# Altium PCB backplane.PCBDOC (part 2 of 4)
Units mil, origin at the board's own origin, x right, y up, seen from the top; angles counter-clockwise.
Board outline 14000 x 4750 mil, 6 copper layers (Top Layer, Internal Plane 1, Mid-Layer 1, Mid-Layer 2, Internal Plane 2, Bottom Layer), stack 54.4 mil thick; 197 components, 240 nets, 1698 pads, 1024 vias.
Unrouted connection lines stored in the file: 2.
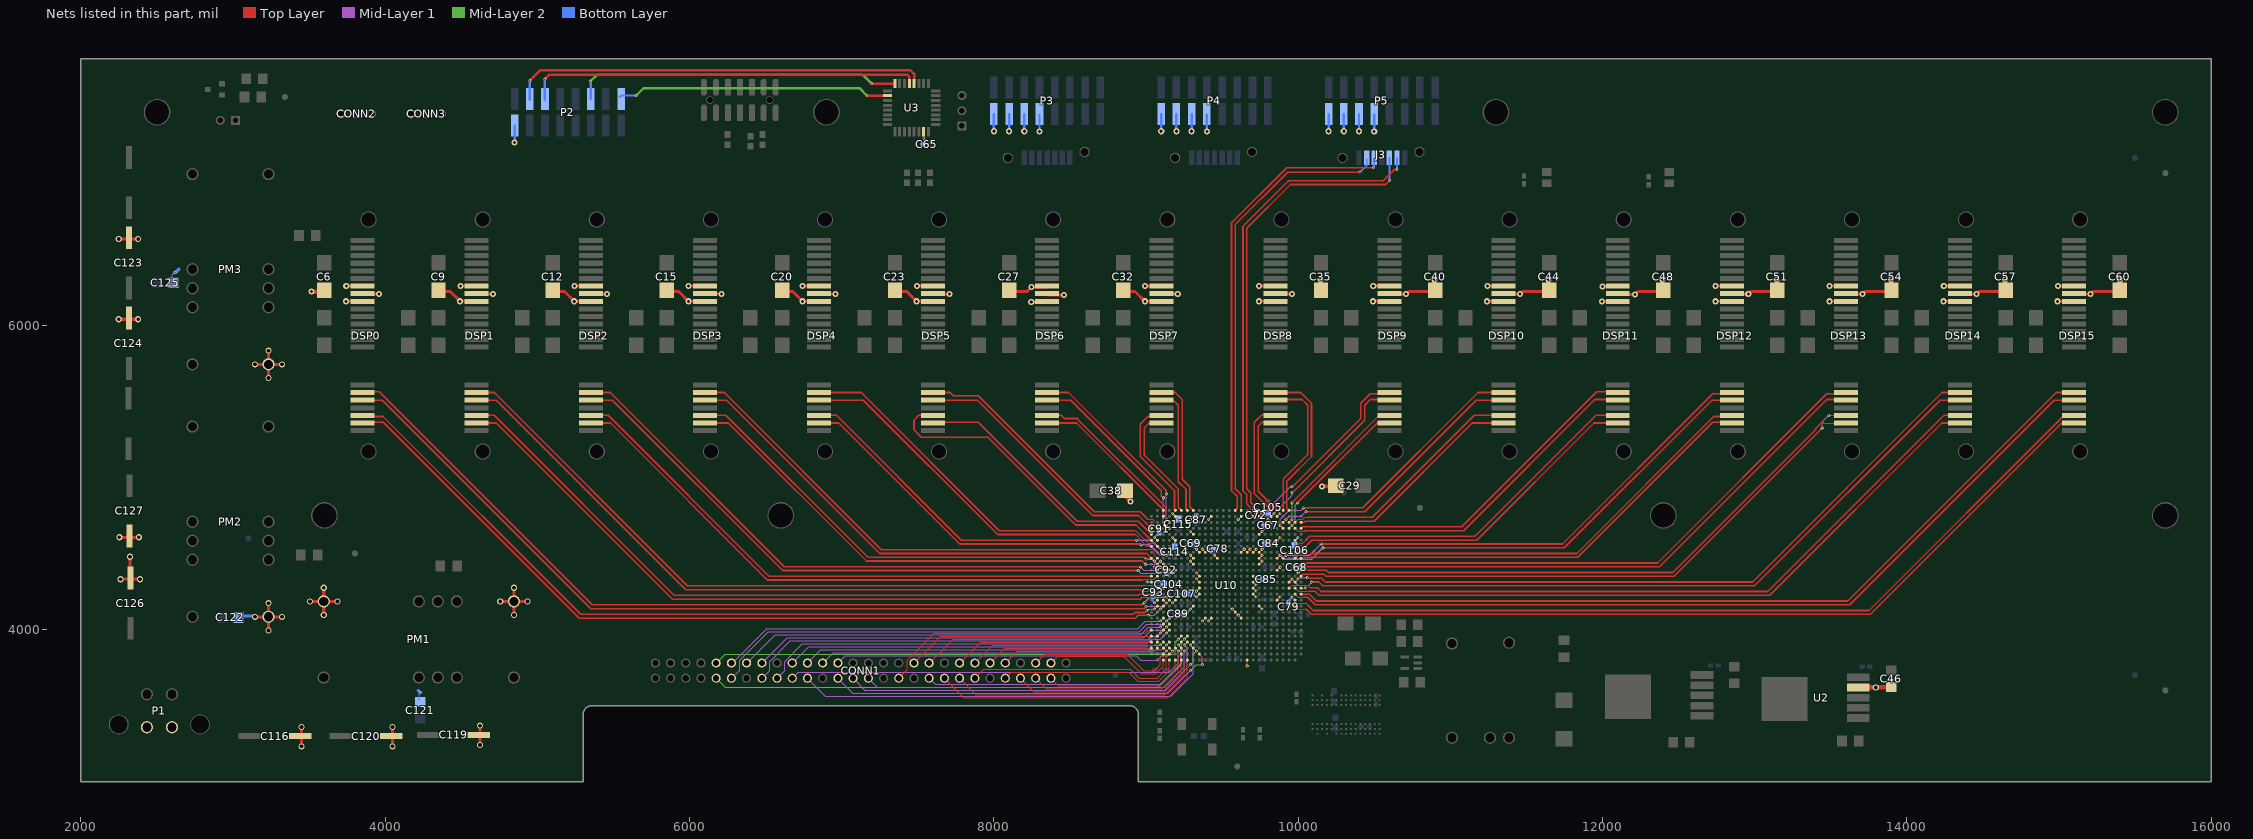
[diagram p6: the nets of this part, all layers, seen from the top]

## Via types
v1: diameter 40, hole 20, Top Layer to Bottom Layer, 338 vias
v2: diameter 20, hole 10, Top Layer to Bottom Layer, tented top, 325 vias
v3: diameter 20, hole 10, Top Layer to Bottom Layer, 197 vias
v4: diameter 40, hole 25, Top Layer to Bottom Layer, 113 vias
v5: diameter 50, hole 25, Top Layer to Bottom Layer, 48 vias
v6: diameter 30, hole 15, Top Layer to Bottom Layer, 3 vias

## Nets (pads, with @x,y where several pads share a name; then routed paths per layer and width w, separated by ;. In a path a pad name is that pad's centre, name@x,y a point inside that pad or via, vN(x,y) a via of type N, cw(c..) or ccw(c..) an arc to the next point about the centre after c; other vN are vias at no path point) (continued)
+2.5VCC: C29.1 C38.1 C46.2 C67.1 C68.1 C69.1 C72.1 C78.1 C79.1 C84.1 C85.1 C87.1 C89.1 C91.1 C92.1 C93.1 C104.1 C105.1 C106.1 C107.1 C114.1 C115.1 U2.4 U10.AF17 U10.B5 U10.B8 U10.B11 U10.B16 U10.B19 U10.B22 U10.E8 U10.E19 U10.F2 U10.F5 U10.F22 U10.F25 U10.H9 U10.H10 U10.H11 U10.H16 U10.H17 U10.H18 U10.H19 U10.J8 U10.J12 U10.J19 U10.K8 U10.K19 U10.L2 U10.L5 U10.L22 U10.L25 U10.M9 U10.M18 U10.N1 U10.N9 U10.N18 U10.P9 U10.P18 U10.P26 U10.R9 U10.R18 U10.T2 U10.T5 U10.T22 U10.T25 U10.U8 U10.U19 U10.V15 U10.W10 U10.W11 U10.W16 | length 2886.1
  Top Layer w6: v2(9005.91,4311.02) 9045.28,4311.02 ; v2(9055.12,4173.23) U10.T2@9074.8,4192.91 ; v2(9055.12,4409.45) U10.L2@9074.8,4389.76 ; v2(9055.12,4606.3) U10.F2@9074.8,4586.61 ; v2(9173.23,4173.23) U10.T5@9192.91,4192.91 ; v2(9173.23,4370.08) U10.L5@9192.91,4389.76 ; v2(9173.23,4606.3) U10.F5@9192.91,4586.61 ; v2(9173.23,4763.78) U10.B5@9192.91,4744.09 ; v2(9291.34,4133.86) U10.U8@9311.02,4153.54 ; v2(9291.34,4448.82) U10.K8@9311.02,4429.13 ; v2(9291.34,4488.19) U10.J8@9311.02,4468.5 ; v2(9291.34,4645.67) U10.E8@9311.02,4625.98 ; v2(9330.71,4212.6) U10.R9@9350.39,4232.28 ; v2(9330.71,4251.97) U10.P9@9350.39,4271.65 ; v2(9330.71,4330.71) U10.N9@9350.39,4311.02 ; v2(9330.71,4370.08) U10.M9@9350.39,4350.39 ; v2(9330.71,4527.56) U10.H9@9350.39,4507.87 ; v2(9370.08,4055.12) U10.W10@9389.76,4074.8 ; v2(9370.08,4527.56) U10.H10@9389.76,4507.87 ; v2(9409.45,4055.12) U10.W11@9429.13,4074.8 ; v2(9409.45,4527.56) U10.H11@9429.13,4507.87 ; v2(9409.45,4724.41) U10.B11@9429.13,4744.09 ; v2(9448.82,4488.19) U10.J12@9468.5,4468.5 ; v2(9566.93,4133.86) U10.V15@9586.61,4114.17 ; v2(9606.3,4094.49) U10.W16@9625.98,4074.8 ; v2(9606.3,4724.41) U10.B16@9625.98,4744.09 ; U10.H16@9625.98,4507.87 v2(9645.67,4527.56) ; v3(9665.35,3759.84) U10.AF17@9665.35,3799.21 ; U10.H17@9665.35,4507.87 v2(9685.04,4527.56) ; U10.R18@9704.72,4232.28 v2(9724.41,4212.6) ; U10.P18@9704.72,4271.65 v2(9724.41,4251.97) ; U10.N18@9704.72,4311.02 v2(9724.41,4291.34) ; U10.M18@9704.72,4350.39 v2(9724.41,4330.71) ; U10.H18@9704.72,4507.87 v2(9724.41,4527.56) ; U10.U19@9744.09,4153.54 v2(9763.78,4133.86) ; U10.K19@9744.09,4429.13 v2(9763.78,4448.82) ; U10.J19@9744.09,4468.5 v2(9763.78,4488.19) ; U10.H19@9744.09,4507.87 v2(9763.78,4527.56) ; U10.E19@9744.09,4625.98 v2(9763.78,4645.67) ; U10.B19@9744.09,4744.09 v2(9763.78,4763.78) ; U10.T22@9862.2,4192.91 v2(9881.89,4212.6) ; U10.L22@9862.2,4389.76 v2(9881.89,4409.45) ; U10.F22@9862.2,4586.61 v2(9881.89,4606.3) ; U10.B22@9862.2,4744.09 v2(9881.89,4763.78) ; v2(9960.63,4212.6) U10.T25@9980.32,4192.91 ; U10.L25@9980.32,4389.76 v2(10000,4370.08) ; U10.F25@9980.32,4586.61 v2(10000,4606.3) ; U10.P26@10019.69,4271.65 v2(10049.21,4271.65)
  Top Layer w8: v2(9291.34,4724.41) U10.B8@9311.02,4744.09
  Top Layer w24: C38.1@8868.11,4911.42 8868.11,4872.05 v1(8897.64,4842.52) ; v1(10157.48,4940.94) C29.1@10236.22,4940.94
  Top Layer w30: U2.4@13681.82,3619.3 v4(13796.47,3619.3) ; v4@13789.37,3622.05 C46.2@13907.48,3622.05
  Bottom Layer w6: C78.1@9442.85,4517.72 9448.82,4511.75 v2(9448.82,4488.19) ; v2(9763.78,4645.67) 9777.56,4659.45
  Bottom Layer w10: v2(9005.91,4311.02) 9104.33,4311.02 C104.1@9116.14,4299.21 ; C93.1@9047.24,4218.5 9047.24,4181.1 v2(9055.12,4173.23) ; v2(9055.12,4606.3) 9084.65,4635.83 C91.1@9086.61,4635.83 ; C92.1@9133.86,4368.11 v2@9171.26,4368.11 ; v2(9173.23,4606.3) 9188.98,4590.55 C114.1@9188.98,4545.28 ; v2(9173.23,4763.78) 9210.63,4726.38 C115.1@9212.6,4726.38 ; C89.1@9242.19,4094.49 9251.97,4094.49 v2(9291.34,4133.86) ; C107.1@9269.68,4236.22 9314.96,4236.22 v2(9330.71,4251.97) ; C107.1@9273.62,4232.28 9311.02,4232.28 v2(9330.71,4212.6) ; v2(9291.34,4724.41) 9313.05,4746.13 C87.1@9330.71,4746.13 ; C69.1@9320.93,4566.93 9320.93,4537.34 v2(9330.71,4527.56) ; v2(9409.45,4527.56) 9434.98,4527.56 9442.85,4519.69 C78.1@9442.85,4517.72 ; v2(9724.41,4330.71) C85.1@9765.68,4330.71 ; C72.1@9724.41,4777.62 9749.94,4777.62 v2(9763.78,4763.78) 9769.69,4769.69 C105.1@9803.15,4769.69 ; v2(9763.78,4527.56) 9781.43,4545.21 C84.1@9781.43,4566.93 ; 9777.56,4659.45 C67.1@9777.56,4685.04 ; C79.1@9937.01,4175.2 9937.01,4188.98 v2(9960.63,4212.6) ; C106.1@9976.38,4553.15 9976.38,4582.68 v2(10000,4606.3) ; v2(10000,4370.08) 10017.72,4387.8 C68.1@10017.72,4409.45
+5VCC: C6.1 C9.1 C12.1 C15.1 C20.1 C23.1 C27.1 C32.1 C35.1 C40.1 C44.1 C48.1 C51.1 C54.1 C57.1 C60.1 C65.1 C116.1 DSP0.P7 DSP0.P8 DSP0.P9 DSP1.P7 DSP1.P8 DSP1.P9 DSP2.P7 DSP2.P8 DSP2.P9 DSP3.P7 DSP3.P8 DSP3.P9 DSP4.P7 DSP4.P8 DSP4.P9 DSP5.P7 DSP5.P8 DSP5.P9 DSP6.P7 DSP6.P8 DSP6.P9 DSP7.P7 DSP7.P8 DSP7.P9 DSP8.P7 DSP8.P8 DSP8.P9 DSP9.P7 DSP9.P8 DSP9.P9 DSP10.P7 DSP10.P8 DSP10.P9 DSP11.P7 DSP11.P8 DSP11.P9 DSP12.P7 DSP12.P8 DSP12.P9 DSP13.P7 DSP13.P8 DSP13.P9 DSP14.P7 DSP14.P8 DSP14.P9 DSP15.P7 DSP15.P8 DSP15.P9 P2.2 P3.2 P3.4 P3.6 P4.2 P4.4 P4.6 P5.2 P5.4 P5.6 PM1.6 U3.7 | length 10084.8
  Top Layer w11: v3(7539.37,7224.41) U3.7@7539.37,7273.62
  Top Layer w18: v1(3742.11,6157.47) DSP0.P7@3848.4,6157.47 ; v1(3743.61,6257.4) DSP0.P9@3850.63,6257.4 ; DSP0.P8@3848.4,6204.71 v1(3958.64,6204.71) ; v1(4492.1,6157.47) DSP1.P7@4598.4,6157.47 ; v1(4493.61,6257.4) DSP1.P9@4600.63,6257.4 ; DSP1.P8@4598.4,6204.71 v1(4708.64,6204.71) ; v1(5242.1,6157.47) DSP2.P7@5348.4,6157.47 ; v1(5243.61,6257.4) DSP2.P9@5350.63,6257.4 ; DSP2.P8@5348.4,6204.71 v1(5458.64,6204.71) ; v1(5992.1,6157.47) DSP3.P7@6098.4,6157.47 ; v1(5993.61,6257.4) DSP3.P9@6100.63,6257.4 ; DSP3.P8@6098.4,6204.71 v1(6208.64,6204.71) ; v1(6742.1,6157.47) DSP4.P7@6848.4,6157.47 ; v1(6743.61,6257.4) DSP4.P9@6850.63,6257.4 ; DSP4.P8@6848.4,6204.71 v1(6958.64,6204.71) ; v1(7492.1,6157.47) DSP5.P7@7598.4,6157.47 ; v1(7493.61,6257.4) DSP5.P9@7600.63,6257.4 ; DSP5.P8@7598.4,6204.71 v1(7708.64,6204.71) ; v1(8245.79,6151.63) DSP6.P7@8352.09,6151.63 ; v1(8247.3,6251.56) DSP6.P9@8354.31,6251.56 ; DSP6.P8@8352.09,6198.87 v1(8462.32,6198.87) ; v1(8992.1,6157.47) DSP7.P7@9098.4,6157.47 ; v1(8993.61,6257.4) DSP7.P9@9100.63,6257.4 ; DSP7.P8@9098.4,6204.71 v1(9208.64,6204.71) ; v1(9742.1,6157.47) DSP8.P7@9848.4,6157.47 ; v1(9743.61,6257.4) DSP8.P9@9850.63,6257.4 ; DSP8.P8@9848.4,6204.71 v1(9958.64,6204.71) ; v1(10492.1,6157.47) DSP9.P7@10598.4,6157.47 ; v1(10493.61,6257.4) DSP9.P9@10600.63,6257.4 ; DSP9.P8@10598.4,6204.71 v1(10708.64,6204.71) ; v1(11242.1,6157.47) DSP10.P7@11348.4,6157.47 ; v1(11243.61,6257.4) DSP10.P9@11350.63,6257.4 ; DSP10.P8@11348.4,6204.71 v1(11458.64,6204.71) ; v1(11997.75,6155.56) DSP11.P7@12104.05,6155.56 ; v1(11999.26,6255.5) DSP11.P9@12106.27,6255.5 ; DSP11.P8@12104.05,6202.81 v1(12214.28,6202.81) ; v1(12742.1,6157.47) DSP12.P7@12848.4,6157.47 ; v1(12743.61,6257.4) DSP12.P9@12850.63,6257.4 ; DSP12.P8@12848.4,6204.71 v1(12958.64,6204.71) ; v1(13492.1,6157.47) DSP13.P7@13598.4,6157.47 ; v1(13493.61,6257.4) DSP13.P9@13600.63,6257.4 ; DSP13.P8@13598.4,6204.71 v1(13708.64,6204.71) ; v1(14242.1,6157.47) DSP14.P7@14348.4,6157.47 ; v1(14243.61,6257.4) DSP14.P9@14350.63,6257.4 ; DSP14.P8@14348.4,6204.71 v1(14458.64,6204.71) ; v1(14992.1,6157.47) DSP15.P7@15098.4,6157.47 ; v1(14993.61,6257.4) DSP15.P9@15100.63,6257.4 ; DSP15.P8@15098.4,6204.71 v1(15208.64,6204.71)
  Top Layer w20: v4(3448.79,3232.29) v4(3448.79,3360.24) ; v4(3505.89,4185.03) PM1.6@3595.46,4185.03 ; v4(3595.46,4095.46) PM1.6@3595.46,4185.03 ; v4(3595.46,4274.61) PM1.6@3595.46,4185.03 ; v4(3685.04,4185.03) PM1.6@3595.46,4185.03 ; C9.1@4350,6221.57 4428,6221.57 v1(4492.1,6157.47) ; C12.1@5100,6221.57 5178,6221.57 v1(5242.1,6157.47) ; C15.1@5850,6221.57 5928,6221.57 v1(5992.1,6157.47) ; C20.1@6600,6221.57 6678,6221.57 v1(6742.1,6157.47) ; C23.1@7350,6221.57 7428,6221.57 v1(7492.1,6157.47) ; C27.1@8094.47,6220.46 8216.52,6220.46 v1@8244.08,6248.02 ; C32.1@8850,6221.57 8928,6221.57 v1(8992.1,6157.47) ; C35.1@10145.65,6220.46 v1(10145.65,6299.2) ; v1(10708.64,6204.71) 10725.5,6221.57 C40.1@10900,6221.57 ; C40.1@10895.65,6220.46 v1(10895.65,6299.2) ; v1(11458.64,6204.71) 11475.5,6221.57 C44.1@11650,6221.57 ; C44.1@11645.65,6220.46 v1(11645.65,6299.2) ; v1(12214.28,6202.81) 12233.05,6221.57 C48.1@12400,6221.57 ; C48.1@12395.65,6220.46 v1(12395.65,6299.2) ; v1(12958.64,6204.71) 12975.5,6221.57 C51.1@13150,6221.57 ; C51.1@13145.65,6220.46 v1(13145.65,6299.2) ; v1(13708.64,6204.71) 13725.5,6221.57 C54.1@13900,6221.57 ; C54.1@13895.65,6220.46 v1(13895.65,6299.2) ; v1(14458.64,6204.71) 14475.5,6221.57 C57.1@14650,6221.57 ; C57.1@14645.65,6220.46 v1(14645.65,6299.2) ; 15225.5,6221.57 15400,6221.57 v1(15400,6297.66)
  Top Layer w30: v1(3515.75,6220.47) C6.1@3602.36,6220.47
  Bottom Layer w16: v1(4850,7200) P2.2@4850,7312.6 ; v1(8000,7275) P3.2@8000,7387.6 ; v1(8100,7275) P3.4@8100,7387.6 ; v1(8200,7275) P3.6@8200,7387.6 ; v1(9100,7275) P4.2@9100,7387.6 ; v1(9200,7275) P4.4@9200,7387.6 ; v1(9300,7275) P4.6@9300,7387.6 ; v1(10200,7275) P5.2@10200,7387.6 ; v1(10300,7275) P5.4@10300,7387.6 ; v1(10400,7275) P5.6@10400,7387.6
+12VCC: C119.1 C120.1 C121.2 C122.2 C123.1 C124.1 C125.2 C126.1 C127.1 CONN2.1 CONN3.1 P1.3 P1.4 P3.8 P4.8 P5.8 PM1.2 PM2.2 PM3.2 | length 2621.1
  Top Layer w20: v4(2248.04,6039.38) v4(2375.99,6039.38) ; v4(2248.04,6566.94) v4(2375.99,6566.94) ; v4(2251.97,4606.3) v4(2379.92,4606.3) ; v4(2259.84,4330.71) v4(2387.8,4330.71) ; C126.1@2322.83,4330.71 v4(2322.83,4478.35) ; v4(3142.7,4083.65) PM2.2@3232.28,4083.65 ; v4(3142.7,5743.1) PM3.2@3232.28,5743.1 ; v4(3232.28,3994.08) PM2.2@3232.28,4083.65 ; v4(3232.28,4173.23) PM2.2@3232.28,4083.65 ; v4(3232.28,5653.52) PM3.2@3232.28,5743.1 ; v4(3232.28,5832.67) PM3.2@3232.28,5743.1 ; v4(3321.85,4083.65) PM2.2@3232.28,4083.65 ; v4(3321.85,5743.1) PM3.2@3232.28,5743.1 ; v4(4047.21,3232.29) v4(4047.21,3360.24) ; v4(4622.02,3240.16) v4(4622.02,3368.11) ; v4(4755.89,4185.03) PM1.2@4845.46,4185.03 ; v4(4845.46,4095.46) PM1.2@4845.46,4185.03 ; v4(4845.46,4274.61) PM1.2@4845.46,4185.03 ; v4(4935.04,4185.03) PM1.2@4845.46,4185.03
  Bottom Layer w6: C125.2@2600,6289.37 2600,6330.31 v3(2618.11,6348.43) ; C121.2@4222.44,3533.46 4222.44,3577.44 v3(4230,3585)
  Bottom Layer w16: v1(8300,7272.4) P3.8@8300,7385 ; v1(9400,7272.4) P4.8@9400,7385 ; v1(10500,7272.4) P5.8@10500,7385
  Bottom Layer w20: C125.2@2600,6275 C125.2@2600,6289.37 ; v3@2620.57,6345.96 2642.7,6368.1 ; C122.2@3040,4090 v4@3145,4090 ; 4215,3600 v3(4230,3585)
ADIORX+: J3.6 U10.A16 | length 2958
  Top Layer w6: U10.A16@9625.98,4783.46 9625.98,4800
  Top Layer w11: 9625.98,4800 9625.98,4886.52 9587.5,4925 9587.5,6662.5 9931.54,7006.54 v3(10406.54,7006.54)
  Bottom Layer w11: v3(10406.54,7006.54) 10450,7050 J3.6@10450,7090
ADIORX-: J3.5 U10.A15 | length 3054.3
  Top Layer w11: 9562.5,6675 9562.5,4912.5 9600,4875 9600,4796.85 U10.A15@9586.61,4783.46 ; 9564.5,6675 9925.42,7035.92 v3(10495.92,7035.92)
  Bottom Layer w11: v3(10495.92,7035.92) 10500,7040 J3.5@10500,7095
ADIOTX+: J3.2 U10.B18 | length 3176.6
  Top Layer w6: 9675,4812.5 9685.04,4802.46 9685.04,4763.78 U10.B18@9704.72,4744.09
  Top Layer w11: 9675,4812.5 9662.5,4825 9662.5,4887.5 9637.5,4912.5 9637.5,6650 9915.65,6928.15 9937.91,6950.39 10560.39,6950.39 10635,7025 v3(10650,7025)
  Bottom Layer w11: v3(10650,7025) J3.2@10650,7100
ADIOTX-: J3.3 U10.A18 | length 3088.5
  Top Layer w11: U10.A18@9704.72,4783.46 9704.72,4820.28 9687.5,4837.5 9687.5,4900 9662.5,4925 9662.5,6637.5 9950,6925 10575,6925 v3(10600,6950)
  Bottom Layer w11: v3(10600,6950) J3.3@10600,7100
BSCLK: P2.11 U3.24 | length 2158.9
  Top Layer w16: v3(7195,7588.46) U3.24@7349.76,7588.46
  Mid-Layer 2 w16: v3(5350,7603.94) 5393.7,7647.64 7135.83,7647.64 v3(7195,7588.46)
  Bottom Layer w16: P2.11@5350,7487.4 v3(5350,7603.94)
BSCS: P2.3 U3.20 | length 2755.5
  Top Layer w16: v3(4950.79,7608.27) 5019.69,7677.17 7450.79,7677.17 7475.75,7652.2 U3.20@7475.75,7588.46
  Bottom Layer w16: P2.3@4950.79,7480.31 v3(4950.79,7608.27)
BSDIN: P2.15 U3.26 | length 1805.5
  Top Layer w16: v3(7166.46,7508.74) U3.26@7301.54,7508.74
  Mid-Layer 2 w16: v3(5649.61,7509.84) 5698.82,7559.06 7116.14,7559.06 v3(7166.46,7508.74)
  Bottom Layer w16: P2.15@5541.34,7500 5551.18,7509.84 v3(5649.61,7509.84)
BSDOUT: P2.5 U3.21 | length 2596.5
  Top Layer w16: v3(5049.21,7618.11) 5078.74,7647.64 7431.1,7647.64 7444.25,7634.49 U3.21@7444.25,7588.46
  Bottom Layer w16: P2.5@5049.21,7480.31 v3(5049.21,7618.11)
DIN0: CONN1.30 U10.AC7 | length 2473.6
  Top Layer w6: v2(9251.97,3897.64) U10.AC7@9271.65,3917.32
  Mid-Layer 1 w6: CONN1.30@7075,3680 7152.64,3602.36 9124.02,3602.36 9271.65,3750 9271.65,3877.95 v2(9251.97,3897.64)
DIN1: CONN1.31 U10.AD4 | length 2282.9
  Top Layer w6: U10.AD4@9153.54,3877.95 v2(9173.23,3858.27)
  Mid-Layer 1 w6: CONN1.31@6975,3780 7023.74,3828.74 8937.01,3828.74 8966.54,3799.21 9074.8,3799.21 9104.33,3828.74 9143.7,3828.74 v2(9173.23,3858.27)
DIN2: CONN1.32 U10.AE9 | length 2589.9
  Top Layer w6: U10.AE9@9350.39,3838.58 9370.08,3818.9 v3(9370.08,3769.68)
  Mid-Layer 1 w6: CONN1.32@6975,3680 7072.32,3582.68 9143.7,3582.68 v3(9291.34,3730.32)
  Mid-Layer 2 w6: v3(9291.34,3730.32) 9330.71,3769.69 v3(9370.08,3769.68)
DIN3: CONN1.33 U10.AD3 | length 2319.1
  Top Layer w6: U10.AD3@9114.17,3877.95 v2(9133.86,3858.27)
  Mid-Layer 1 w6: CONN1.33@6875,3780 6943.43,3848.43 9124.02,3848.43 v2(9133.86,3858.27)
DIN4: CONN1.35 U10.AC4 | length 2435.4
  Top Layer w6: v2(9133.86,3897.64) U10.AC4@9153.54,3917.32
  Mid-Layer 1 w6: CONN1.35@6775,3780 6863.11,3868.11 9104.33,3868.11 v2(9133.86,3897.64)
DIN5: CONN1.36 U10.AC8 | length 2868.6
  Top Layer w6: v2(9291.34,3897.64) U10.AC8@9311.02,3917.32
  Mid-Layer 1 w6: CONN1.36@6775,3680 6892.01,3562.99 9163.39,3562.99 9311.02,3710.63 9311.02,3877.95 v2(9291.34,3897.64)
DIN6: CONN1.37 U10.AC3 | length 2496.1
  Top Layer w6: v2(9094.49,3897.64) U10.AC3@9114.17,3917.32
  Mid-Layer 1 w6: CONN1.37@6675,3780 6782.8,3887.8 9005.91,3887.8 9015.75,3897.64 v2(9094.49,3897.64)
DIN7: CONN1.38 U10.AD5 | length 2685.1
  Top Layer w6: U10.AD5@9192.91,3877.95 v2(9212.6,3858.27)
  Mid-Layer 1 w6: CONN1.38@6675,3680 6715.47,3720.47 9153.07,3720.47 9212.6,3780 v2(9212.6,3858.27)
DIN8: CONN1.40 U10.AA4 | length 2744.8
  Top Layer w6: v2(9133.86,3976.38) U10.AA4@9153.54,3996.06
  Mid-Layer 1 w6: CONN1.40@6575,3680 6624.02,3729.02 6624.02,3789.37 6742.13,3907.48 9005.91,3907.48 9035.43,3937.01 9094.49,3937.01 v2(9133.86,3976.38)
DIN9: CONN1.41 U10.Y4 | length 2784.3
  Top Layer w6: v2(9133.86,4015.75) U10.Y4@9153.54,4035.43
  Mid-Layer 1 w6: CONN1.41@6475,3780 6641.85,3946.85 8986.22,3946.85 9035.43,3996.06 9114.17,3996.06 v2(9133.86,4015.75)
DIN10: CONN1.42 U10.AA3 | length 2802.8
  Top Layer w6: v2(9094.49,3976.38) U10.AA3@9114.17,3996.06
  Mid-Layer 1 w6: CONN1.42@6476.38,3681.1 6525.59,3730.32 6525.59,3789.37 6663.39,3927.17 9005.91,3927.17 9035.43,3956.69 9074.8,3956.69 v2(9094.49,3976.38)
DIN11: CONN1.43 U10.Y3 | length 2845
  Top Layer w6: v2(9094.49,4015.75) U10.Y3@9114.17,4035.43
  Mid-Layer 1 w6: CONN1.43@6375,3780 6561.54,3966.54 8966.54,3966.54 9015.75,4015.75 v2(9094.49,4015.75)
DIN12: CONN1.45 U10.W3 | length 2957
  Top Layer w6: v2(9094.49,4055.12) U10.W3@9114.17,4074.8
  Mid-Layer 1 w6: CONN1.45@6279.53,3779.53 6505.91,4005.91 8946.85,4005.91 8996.06,4055.12 v2(9094.49,4055.12)
DIN13: CONN1.46 U10.W4 | length 3080.2
  Top Layer w6: v2(9133.86,4055.12) U10.W4@9153.54,4074.8
  Mid-Layer 1 w6: CONN1.46@6275,3680 6328.74,3733.74 6328.74,3798.74 6516.22,3986.22 8956.69,3986.22 9005.91,4035.43 9114.17,4035.43 v2(9133.86,4055.12)
DIN14: CONN1.47 U10.AB6 | length 3170.8
  Top Layer w6: v2(9212.6,3937.01) U10.AB6@9232.28,3956.69
  Mid-Layer 2 w6: CONN1.47@6175,3780 6233.58,3838.58 9183.07,3838.58 9192.91,3848.43 9192.91,3917.32 v2(9212.6,3937.01)
DIN15: CONN1.48 U10.AB7 | length 3340
  Top Layer w6: v2(9251.97,3937.01) U10.AB7@9271.65,3956.69
  Mid-Layer 2 w6: CONN1.48@6175,3680 6232.95,3622.05 9074.8,3622.05 9232.28,3779.53 9232.28,3917.32 v2(9251.97,3937.01)
DINEN: CONN1.28 U10.AD6 | length 2288.9
  Top Layer w6: U10.AD6@9232.28,3877.95 v2(9251.97,3858.27)
  Mid-Layer 1 w6: CONN1.28@7175,3680 7232.95,3622.05 9122.05,3622.05 9251.97,3751.97 v2(9251.97,3858.27)
DOUT0: CONN1.3 U10.AF3 | length 864.9
  Top Layer w6: CONN1.3@8375,3780 8420,3825 8855,3825 8969.37,3710.63 9064.96,3710.63 9114.17,3759.84 U10.AF3@9114.17,3799.21
DOUT1: CONN1.4 U10.AF5 | length 947.5
  Top Layer w6: CONN1.4@8375,3680 8423.11,3631.89 9094.49,3631.89 9192.91,3730.31 U10.AF5@9192.91,3799.21
DOUT2: CONN1.5 U10.AE3 | length 982
  Top Layer w6: CONN1.5@8275,3780 8333.58,3838.58 8877.95,3838.58 8986.22,3730.32 9055.12,3730.32 9094.49,3769.68 9094.49,3818.9 U10.AE3@9114.17,3838.58
DOUT3: CONN1.6 U10.AE6 | length 1136.8
  Top Layer w6: CONN1.6@8275,3680 8342.8,3612.2 9104.33,3612.2 9212.6,3720.47 9212.6,3818.9 U10.AE6@9232.28,3838.58
DOUT4: CONN1.8 U10.AF6 | length 1236.8
  Top Layer w6: CONN1.8@8175,3680 8262.48,3592.52 9124.02,3592.52 9232.28,3700.79 U10.AF6@9232.28,3799.21
DOUT5: CONN1.9 U10.AD2 | length 1040.4
  Top Layer w6: CONN1.9@8075,3780 8153.27,3858.27 9055.12,3858.27 U10.AD2@9074.8,3877.95
DOUT6: CONN1.10 U10.AF4 | length 1217.2
  Top Layer w6: CONN1.10@8075,3680 8115.47,3720.47 8887.8,3720.47 8946.85,3661.42 9084.65,3661.42 9153.54,3730.31 U10.AF4@9153.54,3799.21
DOUT7: CONN1.11 U10.AD1 | length 1101
  Top Layer w6: CONN1.11@7975,3780 8072.95,3877.95 U10.AD1@9035.43,3877.95
DOUT8: CONN1.13 U10.AC2 | length 1256.7
  Top Layer w6: CONN1.13@7875,3780 7992.64,3897.64 9055.12,3897.64 U10.AC2@9074.8,3917.32
DOUT9: CONN1.14 U10.AE4 | length 1439.9
  Top Layer w6: CONN1.14@7874.02,3681.1 7933.07,3740.16 8897.64,3740.16 8956.69,3681.1 9074.8,3681.1 9133.86,3740.16 9133.86,3818.9 U10.AE4@9153.54,3838.58
  Top Layer w8: CONN1.14@7875,3680 CONN1.14@7875.06,3680.06
DOUT10: CONN1.15 U10.AC1 | length 1317.3
  Top Layer w6: CONN1.15@7775,3780 7912.32,3917.32 U10.AC1@9035.43,3917.32
DOUT11: CONN1.16 U10.AF7 | length 1680.9
  Top Layer w6: CONN1.16@7775,3680 7882.17,3572.83 9124.02,3572.83 9251.97,3700.79 9251.97,3779.53 U10.AF7@9271.65,3799.21
DOUT12: CONN1.18 U10.AD8 | length 1931.7
  Top Layer w6: CONN1.18@7675,3680 7801.85,3553.15 9143.7,3553.15 9271.65,3681.1 9271.65,3750 v3(9291.34,3769.68) ; U10.AD8@9311.02,3877.95 v2(9330.71,3858.27)
  Mid-Layer 2 w6: v3(9291.34,3769.68) 9311.02,3789.37 9311.02,3838.58 v2(9330.71,3858.27)
DOUT13: CONN1.19 U10.AB2 | length 1573
  Top Layer w6: CONN1.19@7575,3780 7732.01,3937.01 9055.12,3937.01 U10.AB2@9074.8,3956.69
DOUT14: CONN1.20 U10.AC6 | length 1893.7
  Top Layer w6: v2(9212.6,3897.64) U10.AC6@9232.28,3917.32
  Mid-Layer 1 w6: CONN1.20@7575,3680 7616,3639 9104,3639 9232.28,3767.28 9232.28,3877.95 v2(9212.6,3897.64)
DOUT15: CONN1.21 U10.AB1 | length 1633.6
  Top Layer w6: CONN1.21@7475,3780 7651.69,3956.69 U10.AB1@9035.43,3956.69
DOUTEN: CONN1.24 U10.AA1 | length 1828.3
  Top Layer w6: CONN1.24@7375,3680 7431.1,3736.1 7431.1,3799.21 7608.27,3976.38 8996.06,3976.38 9015.75,3996.06 U10.AA1@9035.43,3996.06
DSP0RX+: DSP0.6 U10.T4 | length 5908
  Top Layer w6: DSP0.6@3854.33,5559.06 DSP0.6@3875,5559.06 ; v2(9133.86,4212.6) U10.T4@9153.54,4192.91
  Top Layer w11: DSP0.6@3875,5562.5 3962.5,5562.5 ; 3960.5,5562.5 5360.5,4162.5 ; 5362.5,4162.5 8975,4162.5 v2(8987.5,4175)
  Mid-Layer 1 w11: v2(8987.5,4175) 9025.1,4212.6 v2(9133.86,4212.6)
DSP0RX-: DSP0.5 U10.T3 | length 5893.3
  Top Layer w6: U10.T3@9114.17,4192.91 v2(9133.86,4173.23)
  Top Layer w11: DSP0.5@3850.63,5507.4 3980.1,5507.4 5350,4137.5 8987.5,4137.5 v2(9000,4150)
  Mid-Layer 1 w6: v2(9000,4150) 9003.54,4153.54 9114.17,4153.54 v2(9133.86,4173.23)
DSP0TX+: DSP0.2 U10.U3 | length 5829.4
  Top Layer w6: DSP0.2@3850.63,5357.4 DSP0.2@3862.5,5357.4 ; v2@9012.5,4094.45 v2@9015.75,4094.45 ; v2(9094.49,4133.86) U10.U3@9114.17,4153.54
  Top Layer w11: DSP0.2@3862.5,5362.5 3987.5,5362.5 5275,4075 8930.55,4075 8950,4094.45 v2@9012.5,4094.45
  Mid-Layer 1 w6: v2(9015.75,4094.49) 9055.12,4094.49 v2(9094.49,4133.86)
DSP0TX-: DSP0.3 U10.U2 | length 5766.1
  Top Layer w6: DSP0.3@3842.52,5405.51 DSP0.3@3850.63,5405.51 ; v2(9055.12,4133.86) U10.U2@9074.8,4153.54
  Top Layer w11: DSP0.3@3875,5400 3985,5400 5285,4100 ; 5287.5,4100 8912.5,4100 8925,4112.5 8994.39,4112.5 v2(9005.91,4124.02)
  Mid-Layer 1 w6: v2(9005.91,4124.02) 9015.75,4133.86 v2(9055.12,4133.86)
DSP1RX+: DSP1.6 U10.P3 | length 5049.3
  Top Layer w6: 8987.5,4291.34 9094.49,4291.34 U10.P3@9114.17,4271.65
  Top Layer w11: DSP1.6@4600.63,5557.4 4717.6,5557.4 ; 4715.6,5557.4 5985.5,4287.5 ; 5987.5,4287.5 8983.66,4287.5 8987.5,4291.34
DSP1RX-: DSP1.5 U10.P2 | length 5002.3
  Top Layer w6: 8987.5,4251.97 9055.12,4251.97 U10.P2@9074.8,4271.65
  Top Layer w11: DSP1.5@4600.63,5507.4 4730.1,5507.4 5975,4262.5 8962.5,4262.5 8973.03,4251.97 8987.5,4251.97
DSP1TX+: DSP1.2 U10.R2 | length 4970.9
  Top Layer w6: DSP1.2@4600.63,5357.4 DSP1.2@4612.5,5357.4 ; 9012.5,4212.5 9050,4212.5 ; 9050,4212.6 9059.06,4212.6 U10.R2@9078.74,4232.28
  Top Layer w11: DSP1.2@4612.5,5357.4 4730.1,5357.4 5887.5,4200 8962.5,4200 8975,4212.5 9012.5,4212.5
DSP1TX-: DSP1.3 U10.R1 | length 4927.6
  Top Layer w11: DSP1.3@4600.63,5407.4 4717.6,5407.4 ; 4715.6,5407.4 5898,4225 ; 5900,4225 8950,4225 8957.28,4232.28 U10.R1@9035.43,4232.28
DSP2RX+: DSP2.6 U10.L4 | length 4302.9
  Top Layer w6: v2(9094.49,4409.45) 9133.86,4409.45 U10.L4@9153.54,4389.76
  Top Layer w11: DSP2.6@5350.63,5557.4 5480.1,5557.4 ; 5478.1,5557.4 6623,4412.5 ; 6625,4412.5 v3(8963.48,4412.5)
  Mid-Layer 1 w6: v3(8963.48,4412.5) 8986.22,4389.76 9074.8,4389.76 v2(9094.49,4409.45)
DSP2RX-: DSP2.5 U10.L3 | length 4250.9
  Top Layer w6: DSP2.5@5342.52,5503.94 DSP2.5@5350.63,5503.94 ; v3@8946.85,4387.5 v3(8949.11,4387.5) ; v2(9094.49,4370.08) U10.L3@9114.17,4389.76
  Top Layer w11: DSP2.5@5350.63,5507.4 5492.6,5507.4 6612.5,4387.5 v3@8946.85,4387.5
  Mid-Layer 1 w6: v3(8949.11,4387.5) 8966.54,4370.08 v2(9094.49,4370.08)
DSP2TX+: DSP2.2 U10.M2 | length 4166.5
  Top Layer w6: DSP2.2@5346.46,5358.27 DSP2.2@5350.63,5358.27 ; 8976.38,4325 8986.22,4325 8991.93,4330.71 9055.12,4330.71 U10.M2@9074.8,4350.39
  Top Layer w11: DSP2.2@5350.63,5357.4 5480.1,5357.4 6512.5,4325 8976.38,4325
DSP2TX-: DSP2.3 U10.M1 | length 4122.6
  Top Layer w11: DSP2.3@5350.63,5407.4 5467.6,5407.4 ; 5465.6,5407.4 6522.61,4350.39 ; 6524.61,4350 U10.M1@9035.43,4350
DSP3RX+: DSP3.6 U10.J2 | length 3445.9
  Top Layer w6: 9012.5,4525 9013.19,4525 9015.75,4527.56 9047.44,4527.56 9055.12,4519.88 9055.12,4488.19 U10.J2@9074.8,4468.5
  Top Layer w11: DSP3.6@6100.63,5557.4 6230.1,5557.4 ; 6228.1,5557.4 7260.5,4525 ; 7262.5,4525 9012.5,4525
DSP3RX-: DSP3.5 U10.J1 | length 3365.1
  Top Layer w11: DSP3.5@6100.63,5507.4 6242.6,5507.4 7250,4500 9003.94,4500 U10.J1@9035.43,4468.5
DSP3TX+: DSP3.2 U10.K3 | length 3414.4
  Top Layer w6: v2(9094.49,4448.82) U10.K3@9114.17,4429.13
  Top Layer w11: DSP3.2@6100.63,5357.4 6255.1,5357.4 7162.5,4450 8975.2,4450 v2(8996.06,4429.13)
  Mid-Layer 1 w6: v2(8996.06,4429.13) 9074.8,4429.13 v2(9094.49,4448.82)
DSP3TX-: DSP3.3 U10.K2 | length 3378.5
  Top Layer w6: DSP3.3@6102.36,5409.45 DSP3.3@6112.5,5409.45 ; v2(9055.12,4448.82) U10.K2@9074.8,4429.13
  Top Layer w11: DSP3.3@6112.5,5409.45 6240.55,5409.45 ; 6238.55,5409.45 7173,4475 ; 7175,4475 8987.5,4475 v2(9000,4462.5)
  Mid-Layer 1 w11: v2(9000,4462.5) 9041.44,4462.5 v2(9055.12,4448.82)
DSP4RX+: DSP4.6 U10.G2 | length 2642.6
  Top Layer w6: 8925,4650 8932.68,4650 9015.75,4566.93 9055.12,4566.93 U10.G2@9074.8,4547.24
  Top Layer w11: DSP4.6@6850.63,5557.4 7130.1,5557.4 ; 7128.1,5557.4 8035.5,4650 ; 8037.5,4650 8925,4650
DSP4RX-: DSP4.5 U10.G1 | length 2582.5
  Top Layer w6: 8928.15,4625 9005.91,4547.24 U10.G1@9035.43,4547.24
  Top Layer w11: DSP4.5@6850.63,5507.4 7142.6,5507.4 8025,4625 8928.15,4625
DSP4TX+: DSP4.2 U10.H4 | length 2671.1
  Top Layer w6: v2(9133.86,4488.19) U10.H4@9153.54,4507.87
  Top Layer w11: DSP4.2@6850.63,5357.4 6980.1,5357.4 7775,4562.5 8961.12,4562.5 v3(8966.54,4557.09)
  Mid-Layer 1 w11: v3(8966.54,4557.09) 9025.59,4557.09 9094.49,4488.19 v2(9133.86,4488.19)
DSP4TX-: DSP4.3 U10.H3 | length 2636.1
  Top Layer w6: v2(9094.49,4527.56) U10.H3@9114.17,4507.87
  Top Layer w11: DSP4.3@6850.63,5407.4 6967.6,5407.4 ; 6965.6,5407.4 7785.5,4587.5 ; 7787.5,4587.5 8936.12,4587.5 v3(8937.01,4586.61)
  Mid-Layer 1 w11: v3(8937.01,4586.61) 9035.43,4586.61 v2(9094.49,4527.56)
DSP5RX+: DSP5.6 U10.D2 | length 1860.7
  Top Layer w6: 9012.5,4724.41 9045.28,4724.41 9055.12,4714.57 9055.12,4685.04 U10.D2@9074.8,4665.35
  Top Layer w11: DSP5.6@7600.63,5557.4 7712.5,5557.4 7732.4,5537.5 7900,5537.5 ; 7898,5537.5 8660.5,4775 ; 8662.5,4775 8962.5,4775 9012.5,4725
DSP5RX-: DSP5.5 U10.D1 | length 1783.6
  Top Layer w11: DSP5.5@7600.63,5507.4 7892.6,5507.4 8650,4750 8950.79,4750 U10.D1@9035.43,4665.35
DSP5TX+: DSP5.2 U10.E1 | length 1753.3
  Top Layer w6: U10.E1@9034.89,4626.53 U10.E1@9035.43,4625.98
  Top Layer w11: DSP5.2@7587.5,5362.5 7900,5362.5 ; 7898,5362.5 8548,4712.5 ; 8550,4712.5 8950,4712.5 U10.E1@9035.43,4627.07
DSP5TX-: DSP5.3 U10.F1 | length 2062.7
  Top Layer w11: DSP5.3@7600.63,5407.4 7507.4,5407.4 7475,5375 7475,5312.5 7523.72,5263.78 7961.22,5263.78 8537.5,4687.5 8934.55,4687.5 U10.F1@9035.43,4586.61
DSP6RX+: DSP6.6 U10.C4 | length 1268.5
  Top Layer w6: v2(9133.86,4724.41) U10.C4@9153.54,4704.72
  Top Layer w11: DSP6.6@8350.63,5557.4 8492.6,5557.4 ; 8490.6,5557.4 9131.86,4916.14 v3(9133.86,4889.76)
  Mid-Layer 1 w6: v2(9133.86,4724.41) v3(9133.86,4889.76)
DSP6RX-: DSP6.5 U10.D4 | length 1269.3
  Top Layer w6: DSP6.5@8346.46,5507.87 DSP6.5@8350.63,5507.87 ; v2(9133.86,4685.04) U10.D4@9153.54,4665.35
  Top Layer w11: DSP6.5@8350.63,5507.4 8505.1,5507.4 9100,4912.5 9100,4880.31 v3(9114.17,4866.14)
  Mid-Layer 1 w6: v3(9114.17,4866.14) 9114.17,4704.72 v2(9133.86,4685.04)
DSP6TX+: DSP6.2 U10.A3 | length 1001.3
  Top Layer w11: DSP6.2@8350.63,5357.4 8540.24,5357.4 ; 8543.24,5357.4 U10.A3@9117.17,4783.47
DSP6TX-: DSP6.3 U10.B3 | length 1107.3
  Top Layer w6: DSP6.3@8346.46,5405.51 DSP6.3@8350.63,5405.51 ; U10.B3@9114.17,4744.09 9133.86,4763.78 9133.86,4800
  Top Layer w11: DSP6.3@8350.63,5407.4 8442.6,5407.4 8462.5,5387.5 8550,5387.5 ; 8545,5387.5 9131.86,4803.64 ; 9133.86,4800 9133.86,4803.64
DSP7RX+: DSP7.6 U10.A8 | length 944.5
  Top Layer w6: DSP7.6@9143.7,5561.02 DSP7.6@9173.23,5561.02
  Top Layer w11: DSP7.6@9100.63,5557.4 9192.6,5557.4 9237.5,5512.5 9237.5,4987.5 9287.5,4937.5 9287.5,4806.99 U10.A8@9311.02,4783.46
DSP7RX-: DSP7.5 U10.A7 | length 863.1
  Top Layer w6: DSP7.5@9094.49,5511.81 DSP7.5@9100.63,5511.81
  Top Layer w11: DSP7.5@9100.63,5507.4 DSP7.5@9143.7,5507.4 ; DSP7.5@9125,5500 9187.5,5500 9212.5,5475 9212.5,4971.65 9262.5,4921.65 9262.5,4792.62 U10.A7@9271.65,4783.46
DSP7TX+: DSP7.2 U10.A6 | length 782
  Top Layer w6: DSP7.2@9075,5354.33 DSP7.2@9104.33,5354.33 ; DSP7.2@9090.55,5354.33 DSP7.2@9100.63,5354.33
  Top Layer w11: 8985.5,5150 9210.5,4925 ; 8987.5,5150 8987.5,5325 9016.83,5354.33 DSP7.2@9075,5354.33 ; 9212.5,4925 9212.5,4803.25 U10.A6@9232.28,4783.46
DSP7TX-: DSP7.3 U10.A5 | length 795.2
  Top Layer w11: DSP7.3@9075,5400 9012.5,5400 8962.5,5350 8962.5,5137.5 9187.5,4912.5 9187.5,4788.88 U10.A5@9192.91,4783.46
DSP8RX+: DSP8.6 U10.A24 | length 1048.8
  Top Layer w11: DSP8.6@9850.63,5557.4 10017.6,5557.4 10087.5,5487.5 10087.5,5137.5 9925,4975 9925,4799.41 U10.A24@9940.95,4783.46 U10.A24@9945.96,4783.46
DSP8RX-: DSP8.5 U10.A23 | length 999.4
  Top Layer w11: DSP8.5@9787.5,5507.4 DSP8.5@9850.63,5507.4 ; DSP8.5@9900,5512.5 10025,5512.5 10062.5,5475 10062.5,5150 9901.58,4989.08 U10.A23@9901.58,4783.46
DSP8TX+: DSP8.2 U10.A22 | length 691
  Top Layer w11: DSP8.2@9812.5,5362.5 9762.5,5362.5 9737.5,5337.5 9737.5,4908.17 U10.A22@9862.2,4783.46
DSP8TX-: DSP8.3 U10.A21 | length 795.4
  Top Layer w11: U10.A21@9822.83,4783.46 9712.5,4893.8 9712.5,5362.5 9762.5,5412.5 DSP8.3@9862.5,5412.5
DSP9RX+: DSP9.6 U10.C21 | length 1266.1
  Top Layer w6: v2(9803.15,4724.41) U10.C21@9822.83,4704.72
  Top Layer w11: v3@9961.54,4937.5 9962.5,4937.5 10412.5,5387.5 10412.5,5487.5 10475,5550 DSP9.6@10600,5550
  Mid-Layer 1 w6: v2(9803.15,4724.41) 9803.15,4793.31 9950.79,4940.94 v3(9960.63,4940.94)
DSP9RX-: DSP9.5 U10.B21 | length 1165
  Top Layer w6: U10.B21@9822.83,4744.09 v2(9842.52,4763.78)
  Top Layer w11: v3@9962.5,4900 10437.5,5375 10437.5,5475 10475,5512.5 DSP9.5@10537.5,5512.5 ; DSP9.5@10537.5,5507.4 DSP9.5@10600.63,5507.4
  Mid-Layer 1 w6: v2(9842.52,4763.78) 9960.63,4881.89 v3(9960.63,4901.57)
DSP9TX+: DSP9.2 U10.D24 | length 1012.6
  Top Layer w6: U10.D24@9940.95,4665.35 v2(9960.63,4685.04)
  Top Layer w11: v3(9995.18,4832.68) 10519.9,5357.4 DSP9.2@10600.63,5357.4
  Mid-Layer 2 w6: v2(9960.63,4685.04) 9980.32,4704.72 9980.32,4817.81 v3(9995.18,4832.68)
DSP9TX-: DSP9.3 U10.C24 | length 1003.9
  Top Layer w6: U10.C24@9940.95,4704.72 v2(9960.63,4724.41)
  Top Layer w11: v3@9962.5,4837.5 10525,5400 DSP9.3@10587.5,5400
  Mid-Layer 2 w6: v2(9960.63,4724.41) v3(9960.63,4832.68)
  Bottom Layer w6: v3(9960.63,4832.68) v3@9960.63,4842.52
DSP10RX+: DSP10.6 U10.D23 | length 1881
  Top Layer w11: v2(9881.89,4685.04) U10.D23@9901.58,4665.35 ; v2(10036.22,4800) 10425,4800 11182.4,5557.4 DSP10.6@11350.63,5557.4
  Mid-Layer 1 w6: v2(9881.89,4685.04) 9881.89,4724.41 9940.94,4783.46 10019.69,4783.46 v2(10036.22,4800)
DSP10RX-: DSP10.5 U10.C23 | length 1781.5
  Top Layer w6: U10.C23@9901.58,4704.72 v2(9921.26,4724.41) ; DSP10.5@11350,5507.4 DSP10.5@11350.63,5507.4
  Top Layer w11: v2(10050.59,4775) 10437.5,4775 11169.9,5507.4 DSP10.5@11350,5507.4
  Mid-Layer 1 w6: v2(9921.26,4724.41) 9940.94,4744.09 10019.68,4744.09 v2(10050.59,4775)
DSP10TX+: DSP10.2 U10.C26 | length 1601.3
  Top Layer w11: U10.C26@10019.69,4704.72 10039.37,4704.72 10047.15,4712.5 10500,4712.5 11144.9,5357.4 DSP10.2@11350.63,5357.4
DSP10TX-: DSP10.3 U10.C25 | length 1661.4
  Top Layer w6: U10.C25@9980.32,4704.72 10000,4724.41 10029.53,4724.41 10042.62,4737.5 10059.06,4737.5 ; DSP10.3@11350,5407.4 DSP10.3@11350.63,5407.4
  Top Layer w11: 10059.06,4737.5 10487.5,4737.5 11157.4,5407.4 DSP10.3@11350,5407.4
DSP11RX+: DSP11.6 U10.D26 | length 2439.4
  Top Layer w11: U10.D26@10019.69,4665.35 10029.33,4675 11075,4675 11962.5,5562.5 DSP11.6@12087.5,5562.5
DSP11RX-: DSP11.5 U10.D25 | length 2474.4
  Top Layer w6: U10.D25@9980.32,4665.35 10000,4645.67 10039.37,4645.67
  Top Layer w11: 10039.37,4645.67 10043.7,4650 11087.5,4650 11950,5512.5 DSP11.5@12087.5,5512.5
DSP11TX+: DSP11.2 U10.H26 | length 2438.6
  Top Layer w11: U10.H26@10019.69,4507.87 10049.21,4537.4 10049.21,4547.24 10089.47,4587.5 11175,4587.5 11944.9,5357.4 DSP11.2@12100.63,5357.4
DSP11TX-: DSP11.3 U10.H25 | length 2510.2
  Top Layer w6: U10.H25@9980.32,4507.87 9990.16,4517.72 10000,4527.56 10000,4557.09 10009.84,4566.93 10029.53,4566.93 10049.21,4586.61
  Top Layer w11: 10049.21,4586.61 10075.1,4612.5 11162.5,4612.5 11957.4,5407.4 DSP11.3@12100.63,5407.4
DSP12RX+: DSP12.6 U10.J23 | length 3514.5
  Top Layer w6: U10.J23@9901.58,4468.5 v2(9921.26,4488.19)
  Top Layer w11: v3(10150,4562.5) 11737.5,4562.5 12725,5550 DSP12.6@12850,5550
  Mid-Layer 1 w6: v2(9921.26,4488.19) 10039.37,4488.19
  Mid-Layer 1 w11: v2(9921.26,4488.19) 10075.69,4488.19 v3(10150,4562.5)
DSP12RX-: DSP12.5 U10.J22 | length 3440
  Top Layer w6: U10.J22@9862.2,4468.5 v2(9881.89,4488.19)
  Top Layer w11: v3(10162.5,4537.5) 11750,4537.5 12719.9,5507.4 DSP12.5@12850.63,5507.4
  Mid-Layer 1 w11: v2(9881.89,4488.19) 9907.58,4462.5 10087.5,4462.5 v3(10162.5,4537.5)
DSP12TX+: DSP12.2 U10.J26 | length 3201.2
  Top Layer w6: U10.J26@10019.69,4468.5 10031,4468.5 10037.5,4475 ; DSP12.2@12812.5,5357.4 DSP12.2@12850.63,5357.4
  Top Layer w11: 10037.5,4475 11837.5,4475 12725,5362.5 DSP12.2@12812.5,5362.5
DSP12TX-: DSP12.3 U10.J25 | length 3238.5
  Top Layer w6: U10.J25@9980.32,4468.5 10000,4488.19 10031.48,4488.19 10035.29,4492 10062.5,4492
  Top Layer w11: 10054.5,4492 10079.5,4492 10087.5,4500 11832.68,4500 12732.68,5400 DSP12.3@12825,5400
DSP13RX+: DSP13.6 U10.K26 | length 4032.1
  Top Layer w11: U10.K26@10019.69,4429.13 10028.05,4437.5 12362.5,4437.5 13475,5550 DSP13.6@13587.5,5550
DSP13RX-: DSP13.5 U10.K25 | length 4085.4
  Top Layer w6: U10.K25@9980.32,4429.13 10000,4409.45 10046.95,4409.45 10050,4412.5 ; DSP13.5@13525,5507.4 DSP13.5@13600.63,5507.4
  Top Layer w11: 10050,4412.5 12375,4412.5 13475,5512.5 DSP13.5@13525,5512.5
DSP13TX+: DSP13.2 U10.L26 | length 3998
  Top Layer w6: 13450,5357.4 DSP13.2@13600.63,5357.4
  Top Layer w11: U10.L26@10019.69,4389.76 10185.24,4389.76 10200,4375 12462.5,4375 13400,5312.5 13400,5319.29 13438.11,5357.4 13450,5357.4
DSP13TX-: DSP13.3 U10.M26 | length 4052.2
  Top Layer w6: v3(13488.11,5407.4) DSP13.3@13600.63,5407.4
  Top Layer w11: U10.M26@10019.69,4350.39 10031.79,4362.5 10170.08,4362.5 10182.58,4350 12470.08,4350 v3(13444.88,5324.8)
  Mid-Layer 1 w6: v3(13444.88,5324.8) 13444.88,5364.17 v3(13488.11,5407.4)
DSP14RX+: DSP14.6 U10.N25 | length 4919.7
  Top Layer w6: U10.N25@9980.32,4311.02 v2(10000,4330.71)
  Top Layer w11: v2(10059.06,4340.55) 10062.11,4337.5 10153.05,4337.5 10178.05,4312.5 12987.5,4312.5 14232.4,5557.4 DSP14.6@14350.63,5557.4
  Mid-Layer 1 w6: v2(10000,4330.71) 10009.84,4340.55 v2@10068.9,4340.55
DSP14RX-: DSP14.5 U10.N24 | length 4958
  Top Layer w11: U10.N24@9940.95,4311.02 v2(9960.63,4330.71) ; v2@10088.58,4312.5 10137.5,4312.5 10162.5,4287.5 13000,4287.5 14219.9,5507.4 DSP14.5@14350.63,5507.4
  Mid-Layer 1 w6: v2(9960.63,4330.71) 10000,4291.34 10068.9,4291.34 v2(10088.58,4311.02)
DSP14TX+: DSP14.2 U10.P25 | length 4858.7
  Top Layer w6: U10.P25@9980.32,4271.65 10000,4251.97 10068.9,4251.97
  Top Layer w11: 10068.9,4251.97 10110.53,4251.97 10137.5,4225 13100,4225 14232.4,5357.4 DSP14.2@14350.63,5357.4
DSP14TX-: DSP14.3 U10.P24 | length 4914.4
  Top Layer w6: U10.P24@9940.95,4271.65 9960.63,4291.34 10062.4,4291.34 10078.74,4275
  Top Layer w11: 10078.74,4275 10125,4275 10150,4250 13087.5,4250 14244.9,5407.4 DSP14.3@14350.63,5407.4
DSP15RX+: DSP15.6 U10.R26 | length 5666.9
  Top Layer w11: U10.R26@10019.69,4232.28 10075,4232.28 10119.78,4187.5 13612.5,4187.5 14982.4,5557.4 DSP15.6@15100.63,5557.4
DSP15RX-: DSP15.5 U10.R25 | length 5706.3
  Top Layer w6: U10.R25@9980.32,4232.28 10000,4212.6 10037.5,4212.6
  Top Layer w11: 10037.5,4212.6 10062.4,4212.6 10112.5,4162.5 13625,4162.5 14969.9,5507.4 DSP15.5@15100.63,5507.4
DSP15TX+: DSP15.2 U10.U25 | length 5663.3
  Top Layer w6: U10.U25@9980.32,4153.54 10000,4133.86 10050,4133.86
  Top Layer w11: 10050,4133.86 10053.64,4133.86 10087.5,4100 13762.5,4100 15019.9,5357.4 DSP15.2@15100.63,5357.4
DSP15TX-: DSP15.3 U10.U24 | length 5719
  Top Layer w6: U10.U24@9940.95,4153.54 9960.63,4173.23 10051.77,4173.23
  Top Layer w11: 10051.77,4173.23 10100,4125 13750,4125 ; 13752,4125 DSP15.3@15034.4,5407.4 ; DSP15.3@15032.4,5407.4 DSP15.3@15100.63,5407.4